# Altium PCB stand.PcbDoc (part 1 of 2)
Units mm, origin at the board's own origin, x right, y up, seen from the top; angles counter-clockwise.
Board outline 152.4 x 292.65 mm, 2 copper layers (Top Layer, Bottom Layer); 16 components, 320 nets, 640 pads, 0 vias.
Unrouted connection lines stored in the file: 32.
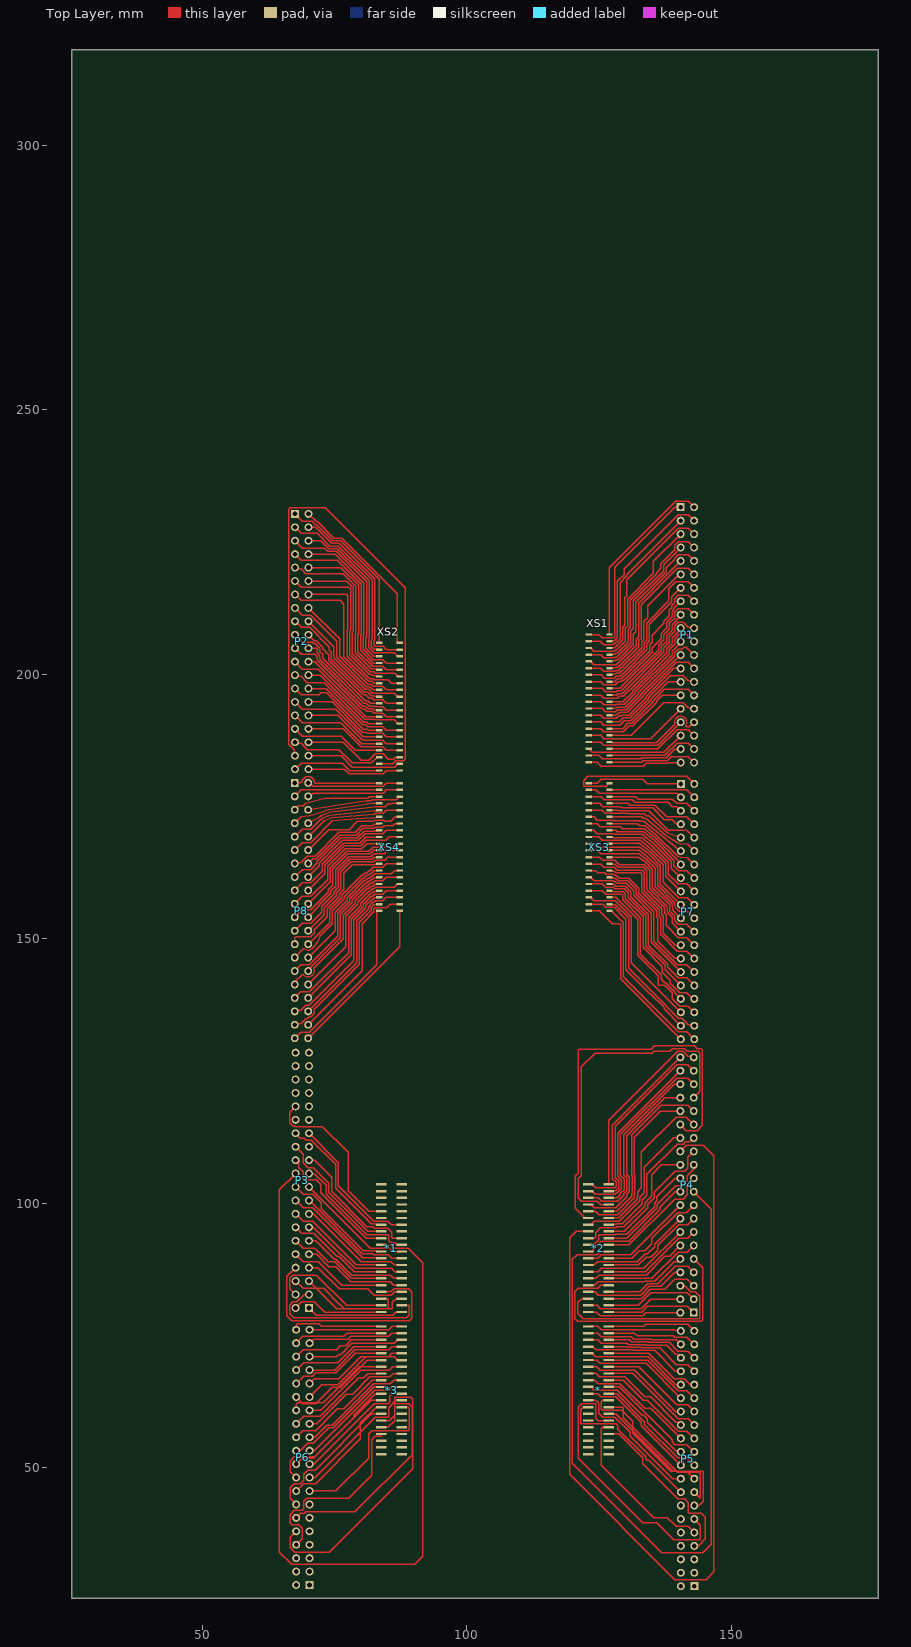
[diagram p0: Top Layer view]
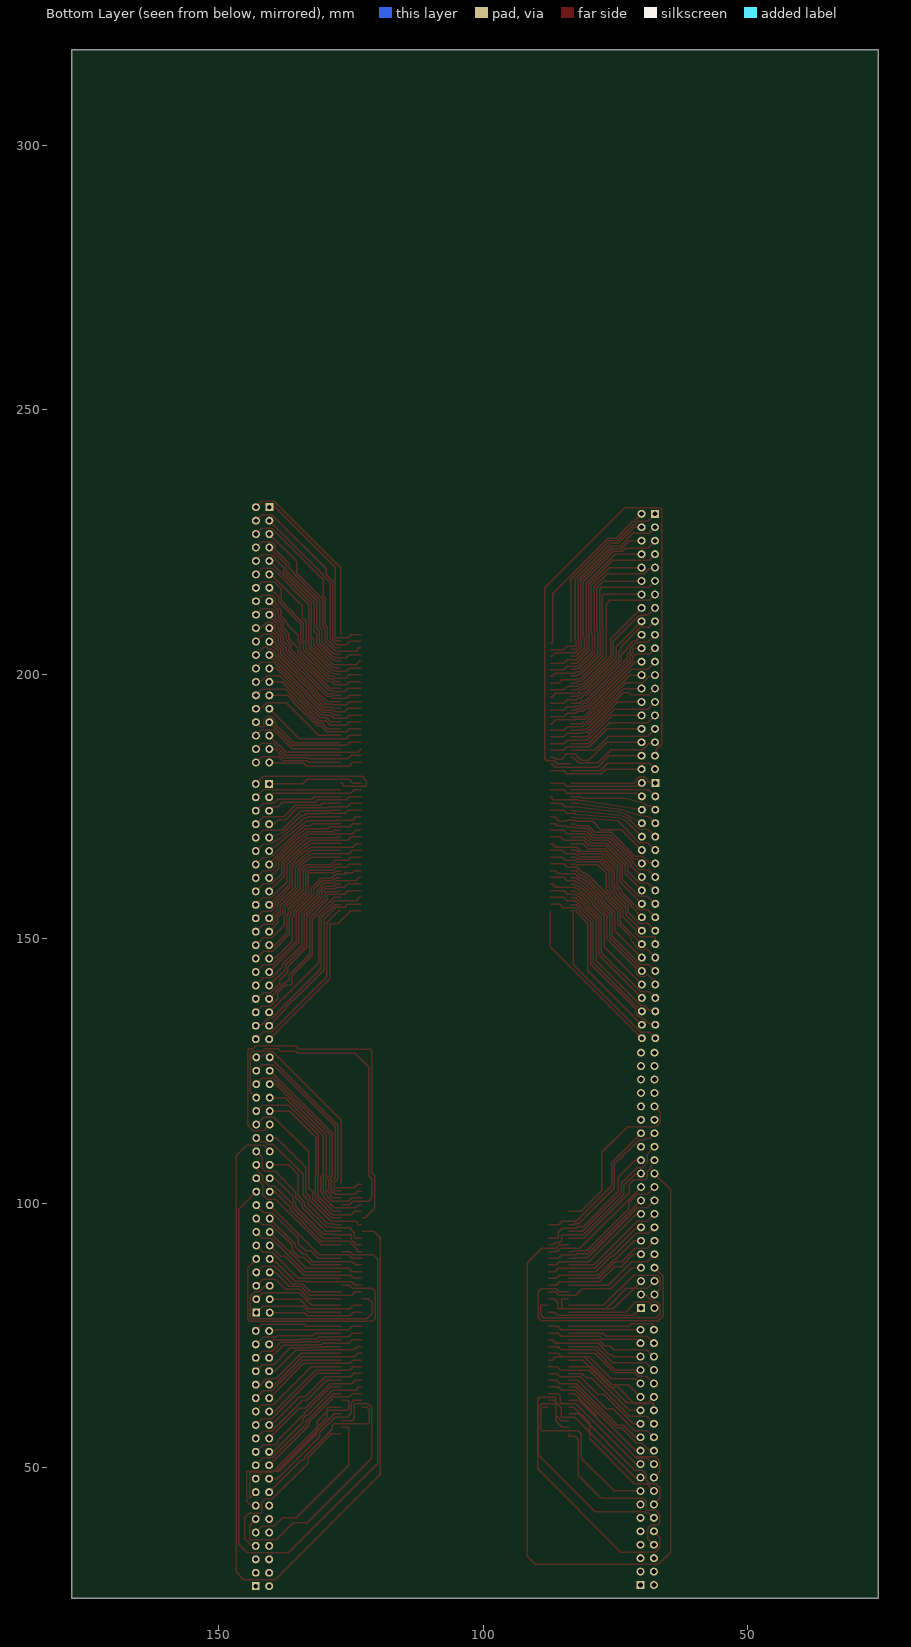
[diagram p1: Bottom Layer view, seen from below]
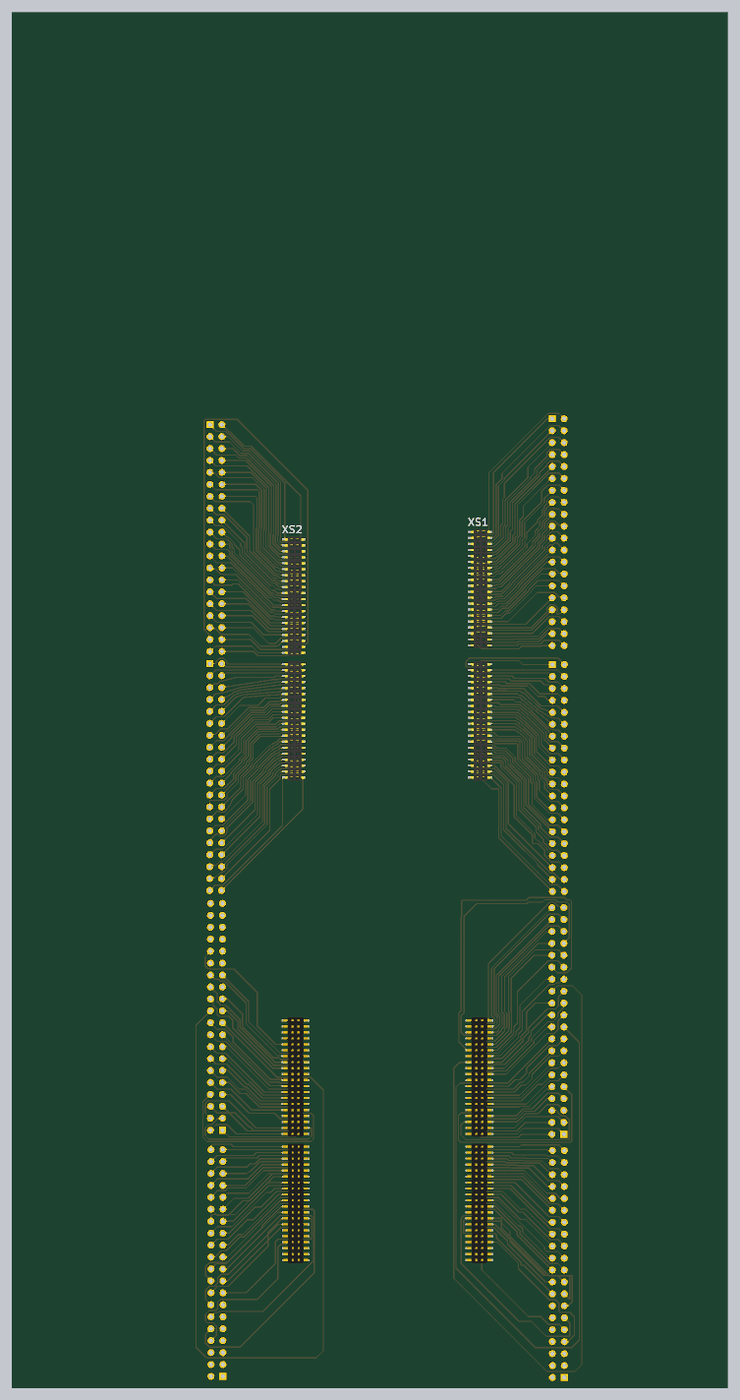
[diagram p3: 3D render of the assembled board from above, using the file's embedded part models]

## Layer stack, top to bottom
Top Solder: solder mask 0.0102, Solder Resist, Dk 3.5
Top Layer: signal copper 0.0356
Dielectric 1: dielectric 0.32, FR-4, Dk 4.8
Bottom Layer: signal copper 0.0356
Bottom Solder: solder mask 0.0102, Solder Resist, Dk 3.5

## Board outline
25.4,25.4 177.8,25.4 177.8,318.05 25.4,318.05

## Design rules (kind name [scope] priority, off if disabled: settings)
Clearance [All] p1: gap=0.254 ignorepadtopadclearanceinfootprint=FALSE except(0: Arc-Hole Track-Hole SMDPad-Hole THPad-Hole Via-Hole Fill-Hole Poly-Hole Region-Hole Text-Hole)
PolygonConnect [All] p1: connectstyle=Relief reliefconductorwidth=0.254 reliefentries=4 polygonreliefangle="90 Angle" airgapwidth=0.254
RoutingVias [All] p1: holewidth=0.711 width=1.27 viastyle="Through Hole" minholewidth=0.711 minwidth=1.27 maxholewidth=0.711 maxwidth=1.27
SolderMaskExpansion [All] p1: expansion=0.102 istentingtop=FALSE
Width [All] p1: maxlimit=0.254 minlimit=0.254 preferedwidth=0.254
30 further rules are at their usual default settings.

## Classes and differential pairs
component class stand: * *2 *3 P1 P3 P4 P5 P6 P7 P8 XS1 XS2 XS4

## Components (designator, comment, footprint, x,y, rotation, side; value= is the part's Value field where it differs from the comment)
* "PLLD-1.27-40S" "Headr 2x20 male" 124.928,64.466 r180 top
*1 "PLLD-1.27-40S" "Headr 2x20 male" 85.803,91.326 r180 top
*2 "PLLD-1.27-40S" "Headr 2x20 male" 124.928,91.326 r180 top
*3 "PLLD-1.27-40S" "Headr 2x20 male" 85.828,64.461 r180 top
P1 "Header 20X2" HDR2X20 140.475,231.61 r270 top
P2 "Header 20X2" HDR2X20 67.575,230.355 r270 top
P3 "Header 20X2" HDR2X20 70.225,80.245 r90 top
P4 "Header 20X2" HDR2X20 142.95,79.36 r90 top
P5 "Header 20X2" HDR2X20 143.05,27.645 r90 top
P6 "Header 20X2" HDR2X20 70.325,27.865 r90 top
P7 "Header 20X2" HDR2X20 140.51,179.31 r270 top
P8 "Header 20X2" HDR2X20 67.525,179.495 r270 top
XS1 "PBD-1.27-40SA" "Headr 2x20 female" 124.928,196.573 r0 top
XS2 "PBD-1.27-40SA" "Headr 2x20 female" 85.302,195 r0 top
XS3 "PBD-1.27-40SA" "Headr 2x20 female" 124.928,168.475 r0 top
XS4 "PBD-1.27-40SA" "Headr 2x20 female" 85.302,168.475 r0 top

## Footprints (in the part's own frame and the unit in brackets; to place one, negate y for a bottom-side part, rotate by r counter-clockwise, add the part's x,y. Pads: shape width x height; smd on the part's side, far side on the other; paste and mask are expansions set on the pad)
HDR2X20 [mm] "Connector; Header; 20x2 Position"
  rect 1.5x1.5 hole 0.9: 1(0,0)
  round 1.5 hole 0.9: 2(0,2.54) 3(2.54,0) 4(2.54,2.54) 5(5.08,0) 6(5.08,2.54) 7(7.62,0) 8(7.62,2.54) 9(10.16,0) 10(10.16,2.54) 11(12.7,0) 12(12.7,2.54) 13(15.24,0) 14(15.24,2.54) 15(17.78,0) 16(17.78,2.54) 17(20.32,0) 18(20.32,2.54) 19(22.86,0) 20(22.86,2.54) 21(25.4,0) 22(25.4,2.54) 23(27.94,0) 24(27.94,2.54) 25(30.48,0) 26(30.48,2.54) 27(33.02,0) 28(33.02,2.54) 29(35.56,0) 30(35.56,2.54) 31(38.1,0) 32(38.1,2.54) 33(40.64,0) 34(40.64,2.54) 35(43.18,0) 36(43.18,2.54) 37(45.72,0) 38(45.72,2.54) 39(48.26,0) 40(48.26,2.54)
"Headr 2x20 female" [mm]
  rect 1.2x0.45 smd: 1(-1.82,10.962) 2(2.08,10.962) 3(-1.82,9.692) 4(2.08,9.692) 5(-1.82,8.422) 6(2.08,8.422) 7(-1.82,7.152) 8(2.08,7.152) 9(-1.82,5.882) 10(2.08,5.882) 11(-1.82,4.612) 12(2.08,4.612) 13(-1.82,3.342) 14(2.08,3.342) 15(-1.82,2.072) 16(2.08,2.072) 17(-1.82,0.802) 18(2.08,0.802) 19(-1.82,-0.468) 20(2.08,-0.468) 21(-1.82,-1.738) 22(2.08,-1.738) 23(-1.82,-3.008) 24(2.08,-3.008) 25(-1.82,-4.278) 26(2.08,-4.278) 27(-1.82,-5.548) 28(2.08,-5.548) 29(-1.82,-6.818) 30(2.08,-6.818) 31(-1.82,-8.088) 32(2.08,-8.088) 33(-1.82,-9.358) 34(2.08,-9.358) 35(-1.82,-10.628) 36(2.08,-10.628) 37(-1.82,-11.898) 38(2.08,-11.898) 39(-1.82,-13.168) 40(2.08,-13.168)
  body extent -1.88,-13.82 2.49,11.57, height 2.5
"Headr 2x20 male" [mm]
  rect 2x0.45 smd: 1(-1.947,11.851) 2(1.953,11.851) 3(-1.947,10.581) 4(1.953,10.581) 5(-1.947,9.311) 6(1.953,9.311) 7(-1.947,8.041) 8(1.953,8.041) 9(-1.947,6.771) 10(1.953,6.771) 11(-1.947,5.501) 12(1.953,5.501) 13(-1.947,4.231) 14(1.953,4.231) 15(-1.947,2.961) 16(1.953,2.961) 17(-1.947,1.691) 18(1.953,1.691) 19(-1.947,0.421) 20(1.953,0.421) 21(-1.947,-0.849) 22(1.953,-0.849) 23(-1.947,-2.119) 24(1.953,-2.119) 25(-1.947,-3.389) 26(1.953,-3.389) 27(-1.947,-4.659) 28(1.953,-4.659) 29(-1.947,-5.929) 30(1.953,-5.929) 31(-1.947,-7.199) 32(1.953,-7.199) 33(-1.947,-8.469) 34(1.953,-8.469) 35(-1.947,-9.739) 36(1.953,-9.739) 37(-1.947,-11.009) 38(1.953,-11.009) 39(-1.947,-12.279) 40(1.953,-12.279)
  body extent -2.7,-12.93 2.7,12.47, height 4.46

## Part data
P1 P2 P3 P4 P5 P6 P7 P8: "Header, 20-Pin, Dual row", LatestRevisionDate=17-Jul-2002, LatestRevisionNote="Re-released for DXP Platform.", Publisher="Altium Limited"

## Nets (pads, with @x,y where several pads share a name; then routed paths per layer and width w, separated by ;. In a path a pad name is that pad's centre, name@x,y a point inside that pad or via, vN(x,y) a via of type N, cw(c..) or ccw(c..) an arc to the next point about the centre after c; other vN are vias at no path point)
Net*1_1: *1.1 P3.1 | length 18.3
  Top Layer w0.254: P3.1@70.225,80.245 71.603,78.867 86.003,78.867 86.611,79.475 *1.1@87.75,79.475
Net*1_2: *1.2 P3.2 | length 17.5
  Top Layer w0.254: P3.2@67.685,80.245 68.857,81.417 71.207,81.417 73.15,79.475 *1.2@83.85,79.475
Net*1_3: *1.3 P3.3 | length 32.5
  Top Layer w0.254: P3.3@70.225,82.785 69.284,82.785 67.876,81.376 67.158,81.376 66.554,80.772 66.554,79.114 67.309,78.359 88.623,78.359 89.131,78.867 89.131,80.745 *1.3@87.75,80.745
Net*1_4: *1.4 P3.4 | length 23.5
  Top Layer w0.254: P3.4@67.685,82.785 66.554,83.916 66.554,85.852 67.164,86.462 71.617,86.462 77.334,80.745 *1.4@83.85,80.745
Net*1_5: *1.5 P3.5 | length 21.2
  Top Layer w0.254: P3.5@70.225,85.325 75.464,80.086 85.928,80.086 85.928,81.28 86.663,82.015 *1.5@87.75,82.015
Net*1_6: *1.6 P3.6 | length 23
  Top Layer w0.254: P3.6@67.685,85.325 69.088,83.922 72.974,83.922 75.906,80.99 76.042,80.99 76.895,80.137 85.242,80.137 85.242,82.015 *1.6@83.85,82.015
Net*1_7: *1.7 P3.7 | length 20
  Top Layer w0.254: P3.7@70.225,87.865 71.908,87.865 75.914,83.86 81.322,83.86 82.556,82.626 85.803,82.626 86.462,83.285 *1.7@87.75,83.285
Net*1_8: *1.8 P3.8 | length 45.2
  Top Layer w0.254: P3.8@67.685,87.865 66.046,86.226 66.046,78.74 66.935,77.851 89.129,77.851 89.639,78.361 89.639,83.312 89.06,83.891 86.304,83.891 85.698,83.285 *1.8@83.85,83.285
Net*1_9: *1.9 P3.9 | length 19.9
  Top Layer w0.254: P3.9@70.225,90.405 71.647,90.405 73.99,88.062 75.235,88.062 78.105,85.192 85.571,85.192 86.208,84.555 *1.9@87.75,84.555
Net*1_10: *1.10 P3.10 | length 18.6
  Top Layer w0.254: P3.10@67.685,90.405 69.088,89.002 71.985,89.002 76.432,84.555 *1.10@83.85,84.555
Net*1_11: *1.11 P3.11 | length 20.5
  Top Layer w0.254: P3.11@70.225,92.945 71.5,92.945 74.965,89.48 75.276,89.48 78.294,86.462 85.604,86.462 86.24,85.825 *1.11@87.75,85.825
Net*1_12: *1.12 P3.12 | length 19.1
  Top Layer w0.254: P3.12@67.685,92.945 69.088,91.542 71.298,91.542 73.868,88.972 75.066,88.972 78.212,85.825 *1.12@83.85,85.825
Net*1_13: *1.13 P3.13 | length 21
  Top Layer w0.254: P3.13@70.225,95.485 71.066,95.485 76.025,90.526 76.166,90.526 78.962,87.73 85.827,87.73 86.462,87.095 *1.13@87.75,87.095
Net*1_14: *1.14 P3.14 | length 19.6
  Top Layer w0.254: P3.14@67.685,95.485 68.846,94.324 71.12,94.324 75.445,89.999 75.851,89.999 78.755,87.095 *1.14@83.85,87.095
Net*1_15: *1.15 P3.15 | length 21.5
  Top Layer w0.254: P3.15@70.225,98.025 71.051,98.025 80.1,88.976 85.674,88.976 86.285,88.365 *1.15@87.75,88.365
Net*1_16: *1.16 P3.16 | length 20.2
  Top Layer w0.254: P3.16@67.685,98.025 69.088,96.622 70.91,96.622 79.167,88.365 *1.16@83.85,88.365
Net*1_17: *1.17 P3.17 | length 22.1
  Top Layer w0.254: P3.17@70.225,100.565 80.268,90.522 82.249,90.522 82.474,90.297 85.166,90.297 85.828,89.635 *1.17@87.75,89.635
Net*1_18: *1.18 P3.18 | length 20.7
  Top Layer w0.254: P3.18@67.685,100.565 69.088,99.162 70.904,99.162 80.351,89.715 82.702,89.715 82.781,89.635 *1.18@83.85,89.635
Net*1_19: *1.19 P3.19 | length 22.6
  Top Layer w0.254: P3.19@70.225,103.105 81.784,91.546 85.424,91.546 85.996,90.974 86.369,90.974 86.438,90.905 *1.19@87.75,90.905
Net*1_20: *1.20 P3.20 | length 21.8
  Top Layer w0.254: P3.20@67.685,103.105 69.088,101.702 70.91,101.702 72.519,100.092 72.519,99.023 80.512,91.03 82.852,91.03 82.977,90.905 *1.20@83.85,90.905
Net*1_21: *1.21 P3.21 | length 24.6
  Top Layer w0.254: P3.21@70.225,105.645 71.235,105.645 73.478,103.402 73.478,101.715 81.137,94.056 85.115,94.056 85.251,93.921 85.251,92.991 85.68,92.562 86.426,92.562 86.813,92.175 *1.21@87.75,92.175
Net*1_22: *1.22 P3.22 | length 166.3
  Top Layer w0.254: P3.22@67.685,105.645 64.618,102.578 64.618,34.112 66.929,31.801 90.17,31.801 91.719,33.35 91.719,88.824 88.976,91.567 86.309,91.567 85.822,92.054 84.836,92.054 84.836,92.175 *1.22@83.85,92.175
Net*1_23: *1.23 P3.23 | length 25.7
  Top Layer w0.254: P3.23@70.225,108.185 71.276,108.185 74.494,104.967 74.494,102.309 81.17,95.633 82.243,95.633 82.537,95.339 85.075,95.339 85.861,94.554 85.861,93.601 86.017,93.445 *1.23@87.75,93.445
Net*1_24: *1.24 P3.24 | length 24.3
  Top Layer w0.254: P3.24@67.685,108.185 68.289,107.581 68.289,106.762 69.088,105.963 69.088,104.851 69.444,104.496 71.552,104.496 72.415,103.632 72.415,102.059 81.03,93.445 *1.24@83.85,93.445
Net*1_25: *1.25 P3.25
Net*1_26: *1.26 P3.26 | length 24.8
  Top Layer w0.254: P3.26@67.685,110.725 69.088,109.322 69.088,107.696 70.002,106.782 71.037,106.782 73.986,103.833 73.986,102.084 81.355,94.715 *1.26@83.85,94.715
Net*1_27: *1.27 P3.27 | length 27.2
  Top Layer w0.254: P3.27@70.225,113.265 75.775,107.715 75.775,103.342 82.469,96.649 85.088,96.649 85.752,95.985 *1.27@87.75,95.985
Net*1_28: *1.28 P3.28 | length 26
  Top Layer w0.254: P3.28@67.685,113.265 68.586,112.364 69.324,112.364 69.722,111.966 70.657,111.966 75.251,107.371 75.251,102.851 81.961,96.141 82.673,96.141 82.829,95.985 *1.28@83.85,95.985
Net*1_29: *1.29 P3.29
Net*1_30: *1.30 P3.30
Net*1_31: *1.31 P3.31
Net*1_32: *1.32 P3.32 | length 32
  Top Layer w0.254: P3.32@67.685,118.345 66.548,117.208 66.548,115.265 67.158,114.656 67.539,114.656 67.666,114.529 72.738,114.529 77.622,109.645 77.622,102.437 81.534,98.525 *1.32@83.85,98.525
Net*1_33: *1.33 P3.33
Net*1_34: *1.34 P3.34
Net*1_35: *1.35 P3.35
Net*1_36: *1.36 P3.36
Net*1_37: *1.37 P3.37
Net*1_38: *1.38 P3.38
Net*1_39: *1.39 P3.39
Net*1_40: *1.40 P3.40
Net*2_1: *2.1 P4.1 | length 17
  Top Layer w0.254: *2.1@126.875,79.475 133.071,79.475 134.19,80.594 141.716,80.594 P4.1@142.95,79.36
Net*2_2: *2.2 P4.2 | length 18
  Top Layer w0.254: *2.2@122.975,79.475 124.562,79.475 125.271,78.765 133.325,78.765 133.919,79.36 P4.2@140.41,79.36
Net*2_3: *2.3 P4.3 | length 17.6
  Top Layer w0.254: *2.3@126.875,80.745 132.436,80.745 134.825,83.134 141.716,83.134 P4.3@142.95,81.9
Net*2_4: *2.4 P4.4 | length 18.4
  Top Layer w0.254: *2.4@122.975,80.745 124.665,80.745 125.298,80.112 132.989,80.112 134.777,81.9 P4.4@140.41,81.9
Net*2_5: *2.5 P4.5 | length 18.1
  Top Layer w0.254: *2.5@126.875,82.015 132.987,82.015 134.765,83.793 137.423,83.793 139.33,85.7 141.69,85.7 P4.5@142.95,84.44
Net*2_6: *2.6 P4.6 | length 36.6
  Top Layer w0.254: *2.6@122.975,82.015 121.741,82.015 121.006,81.28 121.006,79.248 122.047,78.207 144.094,78.207 144.094,82.471 143.256,83.309 142.38,83.309 141.249,84.44 P4.6@140.41,84.44
Net*2_7: *2.7 P4.7 | length 18.5
  Top Layer w0.254: *2.7@126.875,83.285 132.729,83.285 134.253,84.809 136.185,84.809 139.488,88.113 141.817,88.113 P4.7@142.95,86.98
Net*2_8: *2.8 P4.8 | length 19.5
  Top Layer w0.254: *2.8@122.975,83.285 124.309,83.285 124.917,82.677 132.883,82.677 134.507,84.301 136.693,84.301 139.372,86.98 P4.8@140.41,86.98
Net*2_9: *2.9 P4.9 | length 48.6
  Top Layer w0.254: *2.9@126.875,84.555 125.374,84.555 124.761,83.942 121.127,83.942 120.498,83.312 120.498,78.232 121.031,77.699 144.323,77.699 144.602,77.978 144.602,87.868 P4.9@142.95,89.52
Net*2_10: *2.10 P4.10 | length 19.5
  Top Layer w0.254: *2.10@122.975,84.555 124.255,84.555 124.866,85.166 133.502,85.166 133.653,85.317 135.574,85.317 139.253,88.996 139.886,88.996 P4.10@140.41,89.52
Net*2_11: *2.11 P4.11 | length 18.7
  Top Layer w0.254: *2.11@126.875,85.825 135.02,85.825 139.974,90.78 141.67,90.78 P4.11@142.95,92.06
Net*2_12: *2.12 P4.12 | length 20
  Top Layer w0.254: *2.12@122.975,85.825 124.435,85.825 125.071,86.462 133.922,86.462 137.472,90.012 138.362,90.012 P4.12@140.41,92.06
Net*2_13: *2.13 P4.13 | length 19.2
  Top Layer w0.254: *2.13@126.875,87.095 133.763,87.095 140.114,93.447 141.797,93.447 P4.13@142.95,94.6
Net*2_14: *2.14 P4.14 | length 20.5
  Top Layer w0.254: *2.14@122.975,87.095 124.89,87.095 125.501,87.706 133.516,87.706 P4.14@140.41,94.6
Net*2_15: *2.15 P4.15 | length 20.2
  Top Layer w0.254: *2.15@126.875,88.365 132.465,88.365 133.943,89.844 134.815,89.844 136.165,91.194 136.165,92.066 140.086,95.987 141.797,95.987 P4.15@142.95,97.14
Net*2_16: *2.16 P4.16 | length 21.3
  Top Layer w0.254: *2.16@122.975,88.365 124.154,88.365 124.765,88.976 132.246,88.976 133.735,90.465 134.195,90.465 135.545,91.815 135.545,92.275 P4.16@140.41,97.14
Net*2_17: *2.17 P4.17 | length 20.8
  Top Layer w0.254: *2.17@126.875,89.635 131.249,89.635 132.624,91.01 133.64,91.01 134.994,92.365 134.994,93.381 139.886,98.273 141.543,98.273 P4.17@142.95,99.68
Net*2_18: *2.18 P4.18 | length 21.6
  Top Layer w0.254: *2.18@122.975,89.635 124.812,89.635 125.474,90.297 131.027,90.297 P4.18@140.41,99.68
Net*2_19: *2.19 P4.19 | length 147.9
  Top Layer w0.254: *2.19@126.875,90.905 125.271,90.905 124.663,90.297 120.879,90.297 119.99,89.408 119.99,50.876 136.881,33.985 144.653,33.985 146.228,35.56 146.228,98.942 P4.19@142.95,102.22
Net*2_20: *2.20 P4.20 | length 22.6
  Top Layer w0.254: *2.20@122.975,90.905 123.848,90.905 123.848,91.209 125.476,92.837 128.38,92.837 128.405,92.862 130.634,92.862 136.544,98.772 136.544,99.308 139.457,102.22 P4.20@140.41,102.22
Net*2_21: *2.21 P4.21 | length 22.4
  Top Layer w0.254: *2.21@126.875,92.175 130.665,92.175 139.328,100.838 140.919,100.838 141.681,101.6 141.681,103.491 P4.21@142.95,104.76
Net*2_22: *2.22 P4.22 | length 24
  Top Layer w0.254: *2.22@122.975,92.175 124.077,92.175 125.014,93.111 125.014,94 125.07,94.056 128.078,94.056 128.225,94.204 130.312,94.204 135.528,99.42 135.528,100.083 135.992,100.546 135.992,101.307 139.445,104.76 P4.22@140.41,104.76
Net*2_23: *2.23 P4.23 | length 23.2
  Top Layer w0.254: *2.23@126.875,93.445 130.303,93.445 136.036,99.179 136.036,99.852 139.535,103.351 140.613,103.351 141.681,104.419 141.681,105.232 142.95,106.501 P4.23@142.95,107.3
Net*2_24: *2.24 P4.24 | length 26.4
  Top Layer w0.254: *2.24@122.975,93.445 124.154,93.445 124.435,93.726 124.435,94.494 125.318,95.377 128.192,95.377 128.368,95.553 129.761,95.553 133.754,99.546 133.754,100.13 134.562,100.939 134.562,101.005 134.976,101.418 134.976,105.428 136.847,107.3 P4.24@140.41,107.3
Net*2_25: *2.25 P4.25 | length 24.6
  Top Layer w0.254: *2.25@126.875,94.715 129.807,94.715 134.262,99.17 134.262,99.832 135.484,101.054 135.484,102.157 139.404,106.078 141.224,106.078 141.808,106.662 141.808,108.698 P4.25@142.95,109.84
Net*2_26: *2.26 P4.26 | length 171
  Top Layer w0.254: *2.26@122.975,94.715 120.725,94.715 119.482,93.472 119.482,48.793 139.37,28.905 145.288,28.905 146.736,30.353 146.736,109.017 144.78,110.973 141.543,110.973 P4.26@140.41,109.84
Net*2_27: *2.27 P4.27 | length 25.7
  Top Layer w0.254: *2.27@126.875,95.985 127.86,95.985 127.86,96.061 128.298,96.061 128.36,96.123 129.392,96.123 133.246,99.977 133.246,100.664 134.104,101.522 134.104,105.529 139.802,111.227 140.92,111.227 141.311,111.618 142.188,111.618 P4.27@142.95,112.38
Net*2_28: *2.28 P4.28 | length 27.6
  Top Layer w0.254: *2.28@122.975,95.985 123.749,95.985 123.749,96.266 124.114,96.631 128.829,96.631 132.738,100.54 132.738,101.175 133.596,102.033 133.596,106.81 139.167,112.38 P4.28@140.41,112.38
Net*2_29: *2.29 P4.29 | length 29.3
  Top Layer w0.254: *2.29@126.875,97.255 128.734,97.255 132.23,100.751 132.23,101.449 132.32,101.539 132.32,102.216 133.046,102.942 133.046,109.734 139.628,116.316 141.554,116.316 P4.29@142.95,114.92
Net*2_30: *2.30 P4.30 | length 76.6
  Top Layer w0.254: *2.30@122.975,97.255 122.379,97.255 120.578,99.056 120.578,105.232 121.082,105.736 121.082,125.705 121.154,125.777 121.154,128.943 121.396,129.184 134.899,129.184 135.482,129.767 143.08,129.767 143.588,129.259 144.272,129.259 144.589,128.942 144.589,114.795 143.561,113.767 141.563,113.767 P4.30@140.41,114.92
Net*2_31: *2.31 P4.31 | length 31.8
  Top Layer w0.254: *2.31@126.875,98.525 128.395,98.525 131.191,101.321 131.191,101.847 131.304,101.96 131.304,105.25 131.191,105.363 131.191,112.987 136.796,118.593 141.817,118.593 P4.31@142.95,117.46
Net*2_32: *2.32 P4.32 | length 32.6
  Top Layer w0.254: *2.32@122.975,98.525 124.358,98.525 124.992,97.892 128.559,97.892 131.722,101.055 131.722,101.659 131.812,101.749 131.812,105.461 131.722,105.551 131.722,112.532 136.65,117.46 P4.32@140.41,117.46
Net*2_33: *2.33 P4.33 | length 64.4
  Top Layer w0.254: *2.33@126.875,99.795 125.353,99.795 124.689,100.459 121.719,100.459 121.086,101.092 121.086,104.652 121.691,105.258 121.691,125.806 124.32,128.435 135.085,128.435 135.402,128.753 138.379,128.753 138.886,129.259 141.192,129.259 141.7,128.751 143.764,128.751 144.081,128.434 144.081,121.131 P4.33@142.95,120
Net*2_34: *2.34 P4.34 | length 33.5
  Top Layer w0.254: *2.34@122.975,99.795 123.52,99.795 124.154,99.162 128.198,99.162 130.327,101.291 130.327,101.702 130.796,102.17 130.796,105.04 130.327,105.509 130.327,112.842 137.485,120 P4.34@140.41,120
Net*2_35: *2.35 P4.35 | length 33.2
  Top Layer w0.254: *2.35@126.875,101.065 128.524,101.065 129.083,101.624 129.083,101.894 129.78,102.591 129.78,104.619 129.083,105.316 129.083,113.034 139.721,123.673 141.817,123.673 P4.35@142.95,122.54
Net*2_36: *2.36 P4.36 | length 34
  Top Layer w0.254: *2.36@122.975,101.065 124.917,101.065 125.576,100.406 128.584,100.406 129.718,101.54 129.718,101.81 130.288,102.381 130.288,104.83 129.718,105.4 129.718,112.951 139.279,122.512 140.382,122.512 P4.36@140.41,122.54
Net*2_37: *2.37 P4.37 | length 34.2
  Top Layer w0.254: *2.37@126.875,102.335 126.973,102.433 128.018,102.433 128.027,102.442 128.194,102.442 128.764,103.012 128.764,104.198 128.067,104.895 128.067,114.558 139.719,126.211 141.819,126.211 P4.37@142.95,125.08
Net*2_38: *2.38 P4.38 | length 34.5
  Top Layer w0.254: *2.38@122.975,102.335 123.75,102.335 124.356,101.729 128.033,101.729 128.238,101.934 128.405,101.934 129.272,102.801 129.272,104.409 128.575,105.106 128.575,113.245 P4.38@140.41,125.08
Net*2_39: *2.39 P4.39 | length 34
  Top Layer w0.254: *2.39@126.875,103.605 126.875,115.684 139.942,128.751 140.878,128.751 141.819,127.81 142.76,127.81 P4.39@142.95,127.62
Net*2_40: *2.40 P4.40 | length 35.7
  Top Layer w0.254: *2.40@122.975,103.605 123.75,103.605 124.405,102.95 127.984,102.95 128.256,103.222 128.256,103.988 127.559,104.685 127.559,114.769 P4.40@140.41,127.62
Net*3_1: *3.1 P6.1
Net*3_2: *3.2 P6.2
Net*3_3: *3.3 P6.3
Net*3_4: *3.4 P6.4
Net*3_5: *3.5 P6.5
Net*3_6: *3.6 P6.6
Net*3_7: *3.7 P6.7
Net*3_8: *3.8 P6.8 | length 36.5
  Top Layer w0.254: P6.8@67.785,35.485 68.936,36.636 68.936,38.608 68.25,39.294 66.98,39.294 66.65,39.624 66.65,41.148 67.476,41.974 68.91,41.974 69.19,42.253 69.19,43.688 69.774,44.272 77.724,44.272 82.042,48.59 82.042,55.372 82.626,55.956 83.875,55.956 *3.8@83.875,56.42
Net*3_9: *3.9 P6.9
Net*3_10: *3.10 P6.10 | length 57.7
  Top Layer w0.254: P6.10@67.785,38.025 66.65,36.89 66.65,35.001 67.564,34.087 74.016,34.087 89.789,49.86 89.789,63.017 89.408,63.398 86.385,63.398 86.385,58.953 85.122,57.69 *3.10@83.875,57.69
Net*3_11: *3.11 P6.11
Net*3_12: *3.12 P6.12 | length 44.5
  Top Layer w0.254: P6.12@67.785,40.565 68.686,41.466 69.322,41.466 69.563,41.707 78.892,41.707 89.687,52.502 89.687,61.468 89.027,62.128 86.385,62.128 86.385,60.001 85.344,58.96 *3.12@83.875,58.96
Net*3_13: *3.13 P6.13
Net*3_14: *3.14 P6.14 | length 27.2
  Top Layer w0.254: P6.14@67.785,43.105 66.65,44.24 66.65,46.228 67.462,47.041 68.529,47.041 69.19,47.701 69.19,48.768 70.002,49.581 71.374,49.581 82.023,60.23 *3.14@83.875,60.23
Net*3_15: *3.15 P6.15 | length 31.8
  Top Layer w0.254: P6.15@70.325,45.645 75.261,45.645 81.493,51.876 81.493,56.487 82.054,57.048 88.9,57.048 89.179,57.328 89.179,61.221 88.9,61.5 *3.15@87.775,61.5
Net*3_16: *3.16 P6.16 | length 24.4
  Top Layer w0.254: P6.16@67.785,45.645 69.181,47.041 71.476,47.041 79.934,55.499 79.934,58.522 82.912,61.5 *3.16@83.875,61.5
Net*3_17: *3.17 P6.17 | length 24.6
  Top Layer w0.254: P6.17@70.325,48.185 71.274,48.185 82.702,59.614 85.268,59.614 85.268,61.424 86.614,62.77 *3.17@87.775,62.77
Net*3_18: *3.18 P6.18 | length 25.6
  Top Layer w0.254: P6.18@67.785,48.185 66.65,49.32 66.65,51.308 67.462,52.121 71.349,52.121 81.998,62.77 *3.18@83.875,62.77
Net*3_19: *3.19 P6.19 | length 23.6
  Top Layer w0.254: P6.19@70.325,50.725 71.147,50.725 82.55,62.128 85.166,62.128 85.522,62.484 85.522,63.635 85.927,64.04 *3.19@87.775,64.04
Net*3_20: *3.20 P6.20 | length 21.9
  Top Layer w0.254: P6.20@67.785,50.725 68.927,51.867 70.998,51.867 78.661,59.53 78.661,59.966 82.735,64.04 *3.20@83.875,64.04
Net*3_21: *3.21 P6.21 | length 22.4
  Top Layer w0.254: P6.21@70.325,53.265 71.242,53.265 82.67,64.694 85.236,64.694 85.852,65.31 *3.21@87.775,65.31
Net*3_22: *3.22 P6.22 | length 21.1
  Top Layer w0.254: P6.22@67.785,53.265 68.607,53.265 70.002,54.661 71.038,54.661 73.935,57.558 74.816,57.558 82.568,65.31 *3.22@83.875,65.31
Net*3_23: *3.23 P6.23 | length 21.9
  Top Layer w0.254: P6.23@70.325,55.805 71.322,55.805 73.583,58.066 74.587,58.066 82.459,65.938 85.566,65.938 86.208,66.58 *3.23@87.775,66.58
Net*3_24: *3.24 P6.24 | length 20.6
  Top Layer w0.254: P6.24@67.785,55.805 69.054,57.074 71.45,57.074 75.589,61.213 76.78,61.213 82.147,66.58 *3.24@83.875,66.58
Net*3_25: *3.25 P6.25 | length 21.4
  Top Layer w0.254: P6.25@70.325,58.345 71.661,58.345 77.265,63.949 78.448,63.949 81.708,67.208 85.471,67.208 86.113,67.85 *3.25@87.775,67.85
Net*3_26: *3.26 P6.26 | length 20
  Top Layer w0.254: P6.26@67.785,58.345 69.181,59.741 72.314,59.741 79.595,67.022 80.525,67.022 81.354,67.85 *3.26@83.875,67.85
Net*3_27: *3.27 P6.27 | length 20.9
  Top Layer w0.254: P6.27@70.325,60.885 72.424,60.885 80.017,68.478 85.42,68.478 86.062,69.12 *3.27@87.775,69.12
Net*3_28: *3.28 P6.28 | length 20.2
  Top Layer w0.254: P6.28@67.785,60.885 67.785,61.994 68.072,62.281 72.923,62.281 79.763,69.12 *3.28@83.875,69.12
Net*3_29: *3.29 P6.29 | length 20.9
  Top Layer w0.254: P6.29@70.325,63.425 72.664,65.764 75.683,65.764 80.937,71.018 86.367,71.018 86.995,70.39 *3.29@87.775,70.39
Net*3_30: *3.30 P6.30 | length 20
  Top Layer w0.254: P6.30@67.785,63.425 69.056,62.154 71.462,62.154 74.565,65.256 76.077,65.256 81.21,70.39 *3.30@83.875,70.39
Net*3_31: *3.31 P6.31 | length 19.8
  Top Layer w0.254: P6.31@70.325,65.965 71.226,66.866 75.832,66.866 79.985,71.018 85.261,71.018 85.903,71.66 *3.31@87.775,71.66
Net*3_32: *3.32 P6.32 | length 18.4
  Top Layer w0.254: P6.32@67.785,65.965 69.194,67.374 70.854,67.374 71.45,67.97 75.287,67.97 78.977,71.66 *3.32@83.875,71.66
Net*3_33: *3.33 P6.33 | length 19.3
  Top Layer w0.254: P6.33@70.325,68.505 75.103,68.505 78.912,72.314 85.268,72.314 85.884,72.93 *3.33@87.775,72.93
Net*3_34: *3.34 P6.34 | length 17.9
  Top Layer w0.254: P6.34@67.785,68.505 69.19,69.91 75.61,69.91 78.631,72.93 *3.34@83.875,72.93
Net*3_35: *3.35 P6.35 | length 18.8
  Top Layer w0.254: P6.35@70.325,71.045 75.413,71.045 75.805,71.436 76.214,71.436 78.34,73.563 86.358,73.563 86.995,74.2 *3.35@87.775,74.2
Net*3_36: *3.36 P6.36 | length 17.4
  Top Layer w0.254: P6.36@67.785,71.045 69.13,72.39 75.44,72.39 76.151,73.101 77.129,73.101 78.228,74.2 *3.36@83.875,74.2
Net*3_37: *3.37 P6.37 | length 18.2
  Top Layer w0.254: P6.37@70.325,73.585 71.111,74.371 77.667,74.371 78.149,74.854 85.268,74.854 85.884,75.47 *3.37@87.775,75.47
Net*3_38: *3.38 P6.38 | length 16.9
  Top Layer w0.254: P6.38@67.785,73.585 69.079,74.879 76.81,74.879 77.4,75.47 *3.38@83.875,75.47
Net*3_39: *3.39 P6.39 | length 17.7
  Top Layer w0.254: P6.39@70.325,76.125 85.294,76.125 85.909,76.74 *3.39@87.775,76.74
Net*3_40: *3.40 P6.40 | length 17.3
  Top Layer w0.254: P6.40@67.785,76.125 67.785,76.98 68.072,77.267 72.06,77.267 72.587,76.74 *3.40@83.875,76.74
Net*_1: *.1 P5.1
Net*_2: *.2 P5.2
Net*_3: *.3 P5.3
Net*_4: *.4 P5.4
Net*_5: *.5 P5.5
Net*_6: *.6 P5.6
Net*_7: *.7 P5.7 | length 33.3
  Top Layer w0.254: *.7@126.875,56.425 128.753,56.425 133.263,51.915 133.263,50.811 139.929,44.145 141.224,44.145 141.91,43.459 141.91,41.631 142.062,41.478 144.323,41.478 145.161,40.64 145.161,36.576 143.85,35.265 P5.7@143.05,35.265
Net*_8: *.8 P5.8
Net*_9: *.9 P5.9 | length 31.3
  Top Layer w0.254: *.9@126.875,57.695 125.73,57.695 125.476,57.441 125.476,50.546 135.407,40.615 137.947,40.615 139.624,38.938 141.917,38.938 P5.9@143.05,37.805
Net*_10: *.10 P5.10
Net*_11: *.11 P5.11 | length 52.5
  Top Layer w0.254: *.11@126.875,58.965 124.916,58.965 124.46,59.421 124.46,62.012 124.343,62.128 121.742,62.128 121.082,61.468 121.082,51.816 133.274,39.624 135.966,39.624 139.192,36.398 144.196,36.398 144.196,39.199 P5.11@143.05,40.345
Net*_12: *.12 P5.12
Net*_13: *.13 P5.13 | length 30
  Top Layer w0.254: *.13@126.875,60.235 128.168,60.235 139.051,49.352 144.704,49.352 144.704,43.688 143.901,42.885 P5.13@143.05,42.885
Net*_14: *.14 P5.14
Net*_15: *.15 P5.15 | length 30
  Top Layer w0.254: *.15@126.875,61.505 129.425,61.505 129.661,61.269 129.661,59.468 139.903,49.225 144.196,49.225 144.196,44.279 P5.15@143.05,45.425
Net*_16: *.16 P5.16 | length 29.3
  Top Layer w0.254: *.16@122.975,61.505 121.895,61.505 121.895,61.265 121.59,60.96 121.59,58.318 128.295,58.318 128.622,57.992 128.622,57.313 133.828,52.107 133.828,51.765 134.112,51.48 134.455,51.48 P5.16@140.51,45.425
Net*_17: *.17 P5.17 | length 27.2
  Top Layer w0.254: *.17@126.875,62.775 125.73,62.775 125.476,62.521 125.476,61.138 125.73,60.884 129.362,60.884 131.458,58.788 131.458,56.528 138.633,49.352 141.663,49.352 P5.17@143.05,47.965
Net*_18: *.18 P5.18 | length 25.2
  Top Layer w0.254: *.18@122.975,62.775 124.46,62.775 124.968,62.267 124.968,60.376 125.73,59.614 128.041,59.614 130.937,56.718 130.937,56.007 138.979,47.965 P5.18@140.51,47.965
Net*_19: *.19 P5.19 | length 22.1
  Top Layer w0.254: *.19@126.875,64.045 128.35,64.045 133.627,58.768 133.627,58.18 139.915,51.892 141.663,51.892 P5.19@143.05,50.505
Net*_20: *.20 P5.20 | length 23.5
  Top Layer w0.254: *.20@122.975,64.045 124.779,64.045 125.4,63.424 128.225,63.424 132.993,58.656 132.993,58.022 P5.20@140.51,50.505
Net*_21: *.21 P5.21 | length 21.5
  Top Layer w0.254: *.21@126.875,65.315 128.87,65.315 138.837,55.348 138.837,54.977 139.383,54.432 141.663,54.432 P5.21@143.05,53.045
Net*_22: *.22 P5.22 | length 23.2
  Top Layer w0.254: *.22@122.975,65.315 123.749,65.315 123.749,65.024 124.079,64.694 128.473,64.694 133.22,59.947 133.518,59.947 134.135,59.33 134.135,58.617 139.707,53.045 P5.22@140.51,53.045
Net*_23: *.23 P5.23 | length 20.7
  Top Layer w0.254: *.23@126.875,66.585 129.63,66.585 133.371,62.844 134.19,62.844 140.061,56.972 141.663,56.972 P5.23@143.05,55.585
Net*_24: *.24 P5.24 | length 22.1
  Top Layer w0.254: *.24@122.975,66.585 124.231,66.585 124.878,65.938 128.965,65.938 133.65,61.253 134.842,61.253 P5.24@140.51,55.585
Net*_25: *.25 P5.25 | length 20.2
  Top Layer w0.254: *.25@126.875,67.855 131.433,67.855 140.03,59.258 141.917,59.258 P5.25@143.05,58.125
Net*_26: *.26 P5.26 | length 21.6
  Top Layer w0.254: *.26@122.975,67.855 124.499,67.855 125.12,67.234 129.917,67.234 133.717,63.433 134.773,63.433 139.547,58.659 139.976,58.659 P5.26@140.51,58.125
Net*_27: *.27 P5.27 | length 19.7
  Top Layer w0.254: *.27@126.875,69.125 132.526,69.125 139.751,61.9 141.815,61.9 P5.27@143.05,60.665
Net*_28: *.28 P5.28 | length 21
  Top Layer w0.254: *.28@122.975,69.125 124.626,69.125 125.273,68.478 131.75,68.478 139.563,60.665 P5.28@140.51,60.665
Net*_29: *.29 P5.29 | length 19.2
  Top Layer w0.254: *.29@126.875,70.395 134.203,70.395 140.006,64.592 141.663,64.592 P5.29@143.05,63.205
Net*_30: *.30 P5.30 | length 20.5
  Top Layer w0.254: *.30@122.975,70.395 124.652,70.395 125.273,69.774 133.941,69.774 P5.30@140.51,63.205
Net*_31: *.31 P5.31 | length 18.6
  Top Layer w0.254: *.31@126.875,71.665 134.463,71.665 139.25,66.878 141.107,66.878 142.24,65.745 P5.31@143.05,65.745
Net*_32: *.32 P5.32 | length 20
  Top Layer w0.254: *.32@122.975,71.665 123.749,71.665 124.395,71.018 134.298,71.018 139.571,65.745 P5.32@140.51,65.745
Net*_33: *.33 P5.33 | length 18.1
  Top Layer w0.254: *.33@126.875,72.935 130.2,72.935 130.308,72.828 132.91,72.828 133.017,72.72 136.487,72.72 139.662,69.545 141.79,69.545 P5.33@143.05,68.285
Net*_34: *.34 P5.34 | length 19.5
  Top Layer w0.254: *.34@122.975,72.935 123.864,72.935 124.485,72.314 131.547,72.314 131.648,72.212 135.534,72.212 139.462,68.285 P5.34@140.51,68.285
Net*_35: *.35 P5.35 | length 17.6
  Top Layer w0.254: *.35@126.875,74.205 130.748,74.205 131.109,73.844 134.359,73.844 134.467,73.736 138.278,73.736 139.929,72.085 141.79,72.085 P5.35@143.05,70.825
Net*_36: *.36 P5.36 | length 18.9
  Top Layer w0.254: *.36@122.975,74.205 124.855,74.205 125.499,73.56 130.376,73.56 130.601,73.336 133.851,73.336 133.959,73.228 137.841,73.228 139.551,71.518 139.817,71.518 P5.36@140.51,70.825
Net*_37: *.37 P5.37 | length 17
  Top Layer w0.254: *.37@126.875,75.475 131.744,75.475 132.232,74.987 139.11,74.987 139.344,74.752 141.663,74.752 P5.37@143.05,73.365
Net*_38: *.38 P5.38 | length 18.4
  Top Layer w0.254: *.38@122.975,75.475 124.804,75.475 125.451,74.828 131.14,74.828 131.617,74.352 134.867,74.352 134.975,74.244 139.631,74.244 P5.38@140.51,73.365
Net*_39: *.39 P5.39 | length 16.9
  Top Layer w0.254: *.39@126.875,76.745 133.477,76.745 133.872,77.14 141.815,77.14 P5.39@143.05,75.905
Net*_40: *.40 P5.40 | length 17.9
  Top Layer w0.254: *.40@122.975,76.745 124.804,76.745 125.425,76.124 139.294,76.124 139.512,75.905 P5.40@140.51,75.905
NetP1_1: P1.1 XS1.1 | length 35.5
  Top Layer w0.254: XS1.1@123.108,207.535 125.023,207.535 125.633,206.925 127.762,206.925 127.989,207.152 127.989,220.255 139.344,231.61 P1.1@140.475,231.61
NetP1_2: P1.2 XS1.2 | length 34.3
  Top Layer w0.254: XS1.2@127.008,207.535 127.008,220.182 139.567,232.741 141.884,232.741 P1.2@143.015,231.61
NetP1_3: P1.3 XS1.3 | length 33.7
  Top Layer w0.254: XS1.3@123.108,206.265 125.246,206.265 125.91,205.601 127.708,205.601 127.962,205.855 128.129,205.855 129.005,206.731 129.005,217.355 130.277,218.627 130.277,218.872 P1.3@140.475,229.07
NetP1_4: P1.4 XS1.4 | length 33.3
  Top Layer w0.254: XS1.4@127.008,206.265 127.106,206.363 127.918,206.363 128.497,206.942 128.497,217.565 129.769,218.837 129.769,219.963 140.007,230.201 141.884,230.201 P1.4@143.015,229.07
NetP1_5: P1.5 XS1.5 | length 32.5
  Top Layer w0.254: XS1.5@123.108,204.995 123.483,204.995 124.089,204.389 127.88,204.389 128.033,204.541 128.252,204.541 130.021,206.311 130.021,208.683 130.425,209.087 130.425,214.25 135.302,219.127 135.302,221.357 P1.5@140.475,226.53
NetP1_6: P1.6 XS1.6 | length 32.1
  Top Layer w0.254: XS1.6@127.008,204.995 127.062,205.049 127.989,205.049 128.287,205.347 128.339,205.347 129.513,206.521 129.513,208.893 129.917,209.297 129.917,214.46 130.277,214.82 130.277,217.908 139.344,226.976 139.344,226.998 140.007,227.661 141.884,227.661 P1.6@143.015,226.53
NetP1_7: P1.7 XS1.7 | length 31.3
  Top Layer w0.254: XS1.7@123.108,203.725 125.37,203.725 125.976,203.119 127.794,203.119 127.946,203.271 128.419,203.271 131.037,205.89 131.037,208.262 131.5,208.725 131.5,213.888 137.238,219.626 137.238,220.753 P1.7@140.475,223.99
NetP1_8: P1.8 XS1.8 | length 30.9
  Top Layer w0.254: XS1.8@127.008,203.725 127.062,203.779 127.989,203.779 128.243,204.033 128.462,204.033 130.529,206.1 130.529,208.472 130.933,208.876 130.933,214.04 135.81,218.917 135.81,219.103 136.73,220.023 136.73,220.963 139.344,223.577 139.344,224.458 140.007,225.121 141.884,225.121 P1.8@143.015,223.99
NetP1_9: P1.9 XS1.9 | length 30.2
  Top Layer w0.254: XS1.9@123.108,202.455 123.483,202.455 124.089,201.849 128.332,201.849 128.738,202.255 128.84,202.255 132.053,205.469 132.053,206.623 132.516,207.086 132.516,213.467 138.254,219.205 138.254,219.229 P1.9@140.475,221.45
NetP1_10: P1.10 XS1.10 | length 29.8
  Top Layer w0.254: XS1.10@127.008,202.455 127.106,202.553 127.946,202.553 128.157,202.763 128.629,202.763 131.545,205.679 131.545,207.567 132.008,208.03 132.008,213.678 137.746,219.416 137.746,220.134 139.344,221.732 139.344,221.918 139.852,222.426 139.852,222.49 139.943,222.581 141.884,222.581 P1.10@143.015,221.45
NetP1_11: P1.11 XS1.11 | length 29.1
  Top Layer w0.254: XS1.11@123.108,201.185 125.37,201.185 125.976,200.579 127.78,200.579 127.878,200.677 128.082,200.677 128.115,200.711 128.631,200.711 129.159,201.239 129.26,201.239 133.069,205.048 133.069,206.202 133.532,206.665 133.532,210.004 134.283,210.755 134.283,212.983 140.21,218.91 P1.11@140.475,218.91
NetP1_12: P1.12 XS1.12 | length 28.7
  Top Layer w0.254: XS1.12@127.008,201.185 127.762,201.185 127.796,201.219 128.42,201.219 128.949,201.747 129.05,201.747 132.561,205.258 132.561,206.413 133.024,206.876 133.024,213.215 136.301,216.492 136.301,216.534 139.833,220.066 141.859,220.066 P1.12@143.015,218.91
NetP1_13: P1.13 XS1.13 | length 27.8
  Top Layer w0.254: XS1.13@123.108,199.915 125.461,199.915 126.067,199.309 127.947,199.309 128.299,199.661 128.503,199.661 128.536,199.695 129.051,199.695 129.58,200.223 129.681,200.223 134.085,204.627 134.085,205.781 134.548,206.244 134.548,209.498 138.748,213.697 138.748,214.642 P1.13@140.475,216.37
NetP1_14: P1.14 XS1.14 | length 27.7
  Top Layer w0.254: XS1.14@127.008,199.915 127.106,200.013 127.933,200.013 128.089,200.169 128.292,200.169 128.326,200.203 128.841,200.203 129.37,200.731 129.471,200.731 133.577,204.838 133.577,205.992 134.04,206.455 134.04,209.708 138.239,213.908 138.239,216.221 139.544,217.526 141.859,217.526 P1.14@143.015,216.37
NetP1_15: P1.15 XS1.15 | length 26.6
  Top Layer w0.254: XS1.15@123.108,198.645 125.37,198.645 125.976,198.039 128.114,198.039 128.72,198.645 128.923,198.645 128.957,198.679 129.472,198.679 130.001,199.207 130.102,199.207 135.101,204.206 135.101,205.026 136.804,206.729 136.804,207.731 137.312,208.239 137.312,208.289 137.82,208.797 137.82,209.85 138.039,210.068 138.836,210.866 138.836,211.969 139.268,212.401 139.268,212.623 P1.15@140.475,213.83
NetP1_16: P1.16 XS1.16 | length 26.3
  Top Layer w0.254: XS1.16@127.008,198.645 127.021,198.658 128.015,198.658 128.51,199.153 128.713,199.153 128.747,199.187 129.262,199.187 129.79,199.715 129.892,199.715 134.593,204.417 134.593,205.571 135.056,206.034 135.056,207.449 137.312,209.705 137.312,210.06 138.328,211.076 138.328,212.179 138.76,212.612 138.76,212.992 139.344,213.576 139.344,214.298 140.031,214.986 141.859,214.986 P1.16@143.015,213.83
NetP1_17: P1.17 XS1.17 | length 25.5
  Top Layer w0.254: XS1.17@123.108,197.375 125.644,197.375 126.25,196.769 128.317,196.769 128.415,196.867 129.198,196.867 136.804,204.473 136.804,205.292 137.82,206.308 137.82,207.31 138.836,208.326 138.836,209.429 140.475,211.068 P1.17@140.475,211.29
NetP1_18: P1.18 XS1.18 | length 25.1
  Top Layer w0.254: XS1.18@127.008,197.375 128.988,197.375 136.296,204.683 136.296,205.503 137.312,206.519 137.312,207.52 137.82,208.028 137.82,208.079 138.328,208.587 138.328,209.639 139.344,210.655 139.344,211.758 140.007,212.421 141.884,212.421 P1.18@143.015,211.29
NetP1_19: P1.19 XS1.19 | length 24.3
  Top Layer w0.254: XS1.19@123.108,196.105 125.37,196.105 125.976,195.499 128.484,195.499 128.836,195.851 129.619,195.851 131.935,198.167 137.82,204.052 137.82,204.871 138.836,205.887 138.836,206.889 140.475,208.528 P1.19@140.475,208.75
NetP1_20: P1.20 XS1.20 | length 23.9
  Top Layer w0.254: XS1.20@127.008,196.105 128.372,196.105 128.626,196.359 129.409,196.359 137.312,204.262 137.312,205.082 138.328,206.098 138.328,207.099 139.344,208.115 139.344,209.218 140.007,209.881 140.943,209.881 141.884,208.94 142.825,208.94 P1.20@143.015,208.75
NetP1_21: P1.21 XS1.21 | length 23.3
  Top Layer w0.254: XS1.21@123.108,194.835 125.37,194.835 125.976,194.229 128.354,194.229 128.452,194.327 129.77,194.327 131.908,196.465 131.908,196.703 138.836,203.631 138.836,204.349 140.475,205.988 P1.21@140.475,206.21